# Altium PCB Jonathan ESC.PcbDoc
Units mm, origin at the board's own origin, x right, y up, seen from the top; angles counter-clockwise.
Board outline 31 x 50 mm, 4 copper layers (Top Layer, GND, 3V3, Bottom Layer), stack 1.64 mm thick; 60 components, 39 nets, 163 pads, 40 vias.
Unrouted connection lines stored in the file: 3.
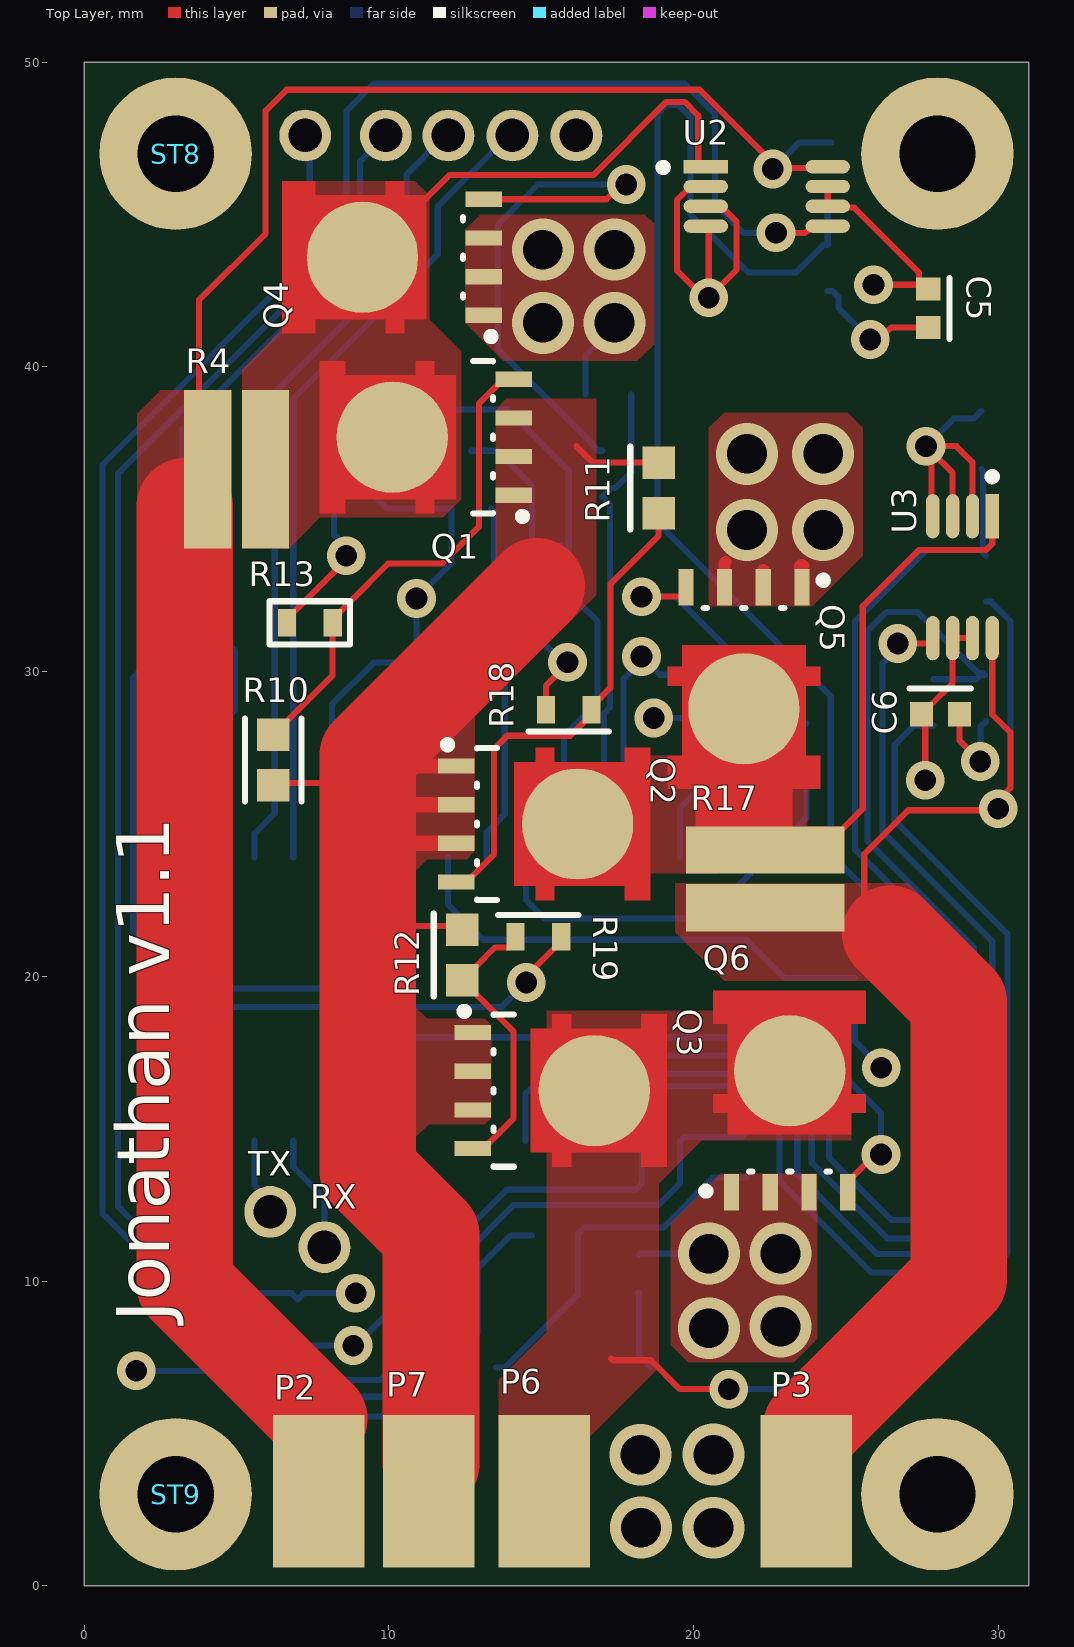
[diagram p0: Top Layer view]
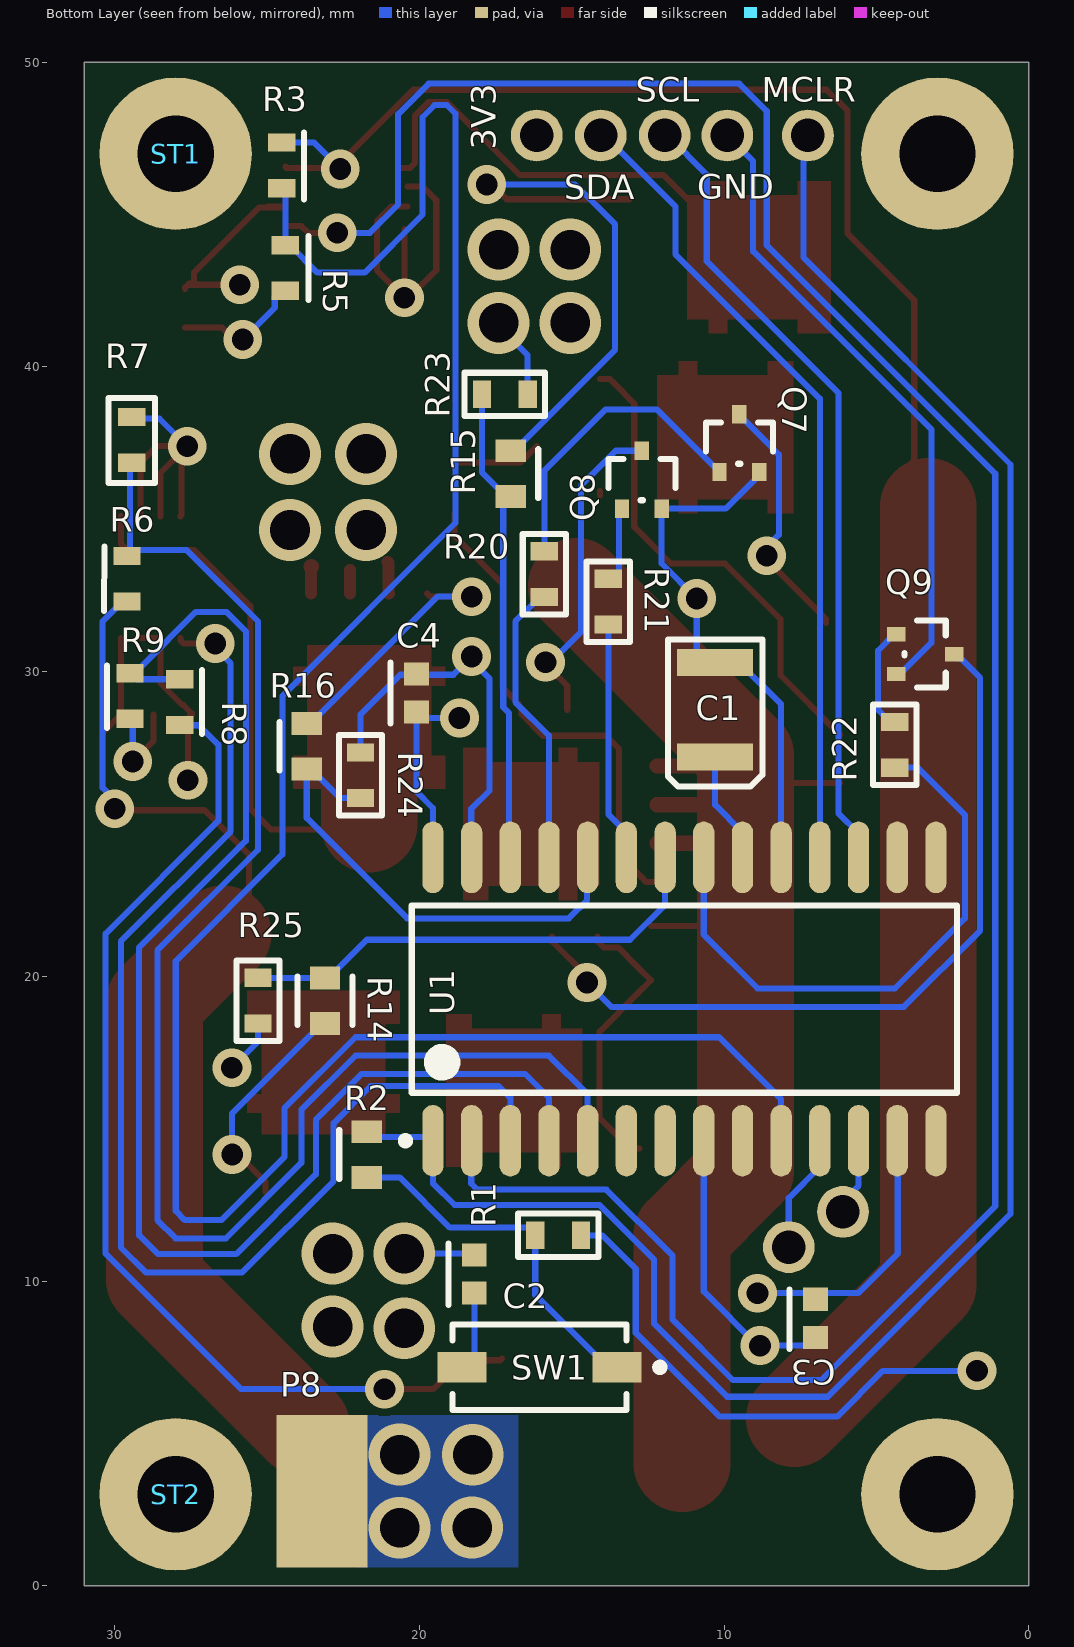
[diagram p1: Bottom Layer view, seen from below]
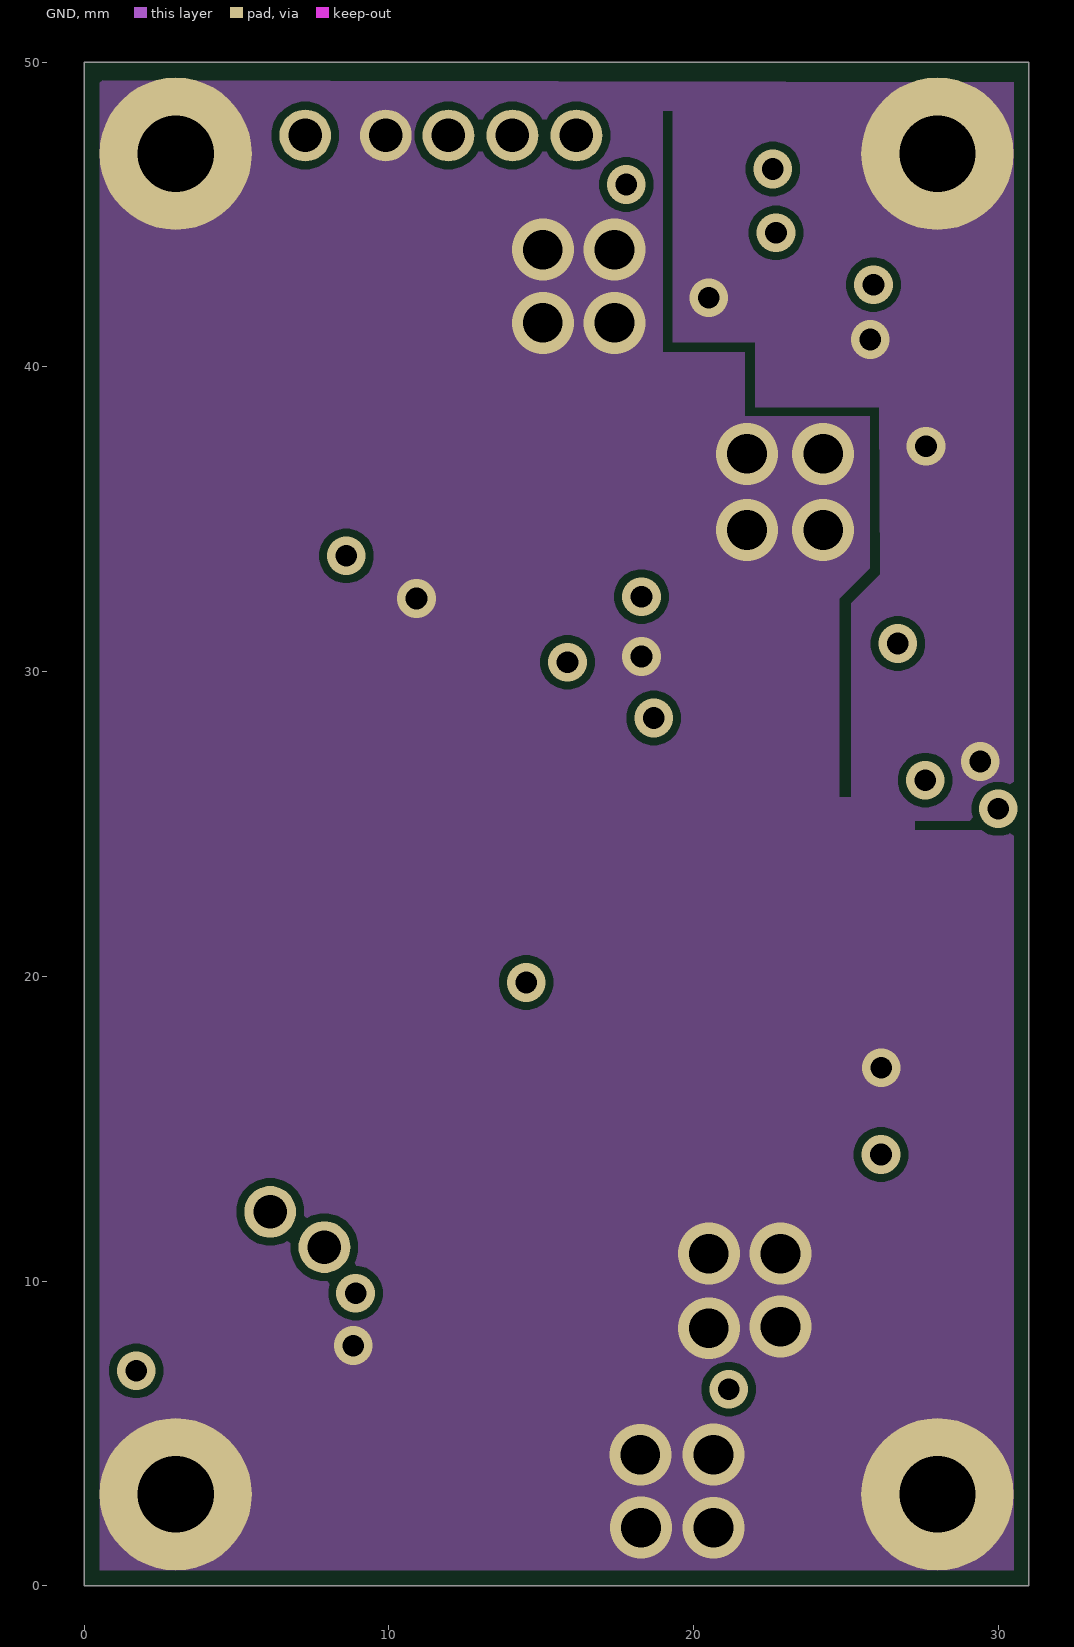
[diagram p2: GND]
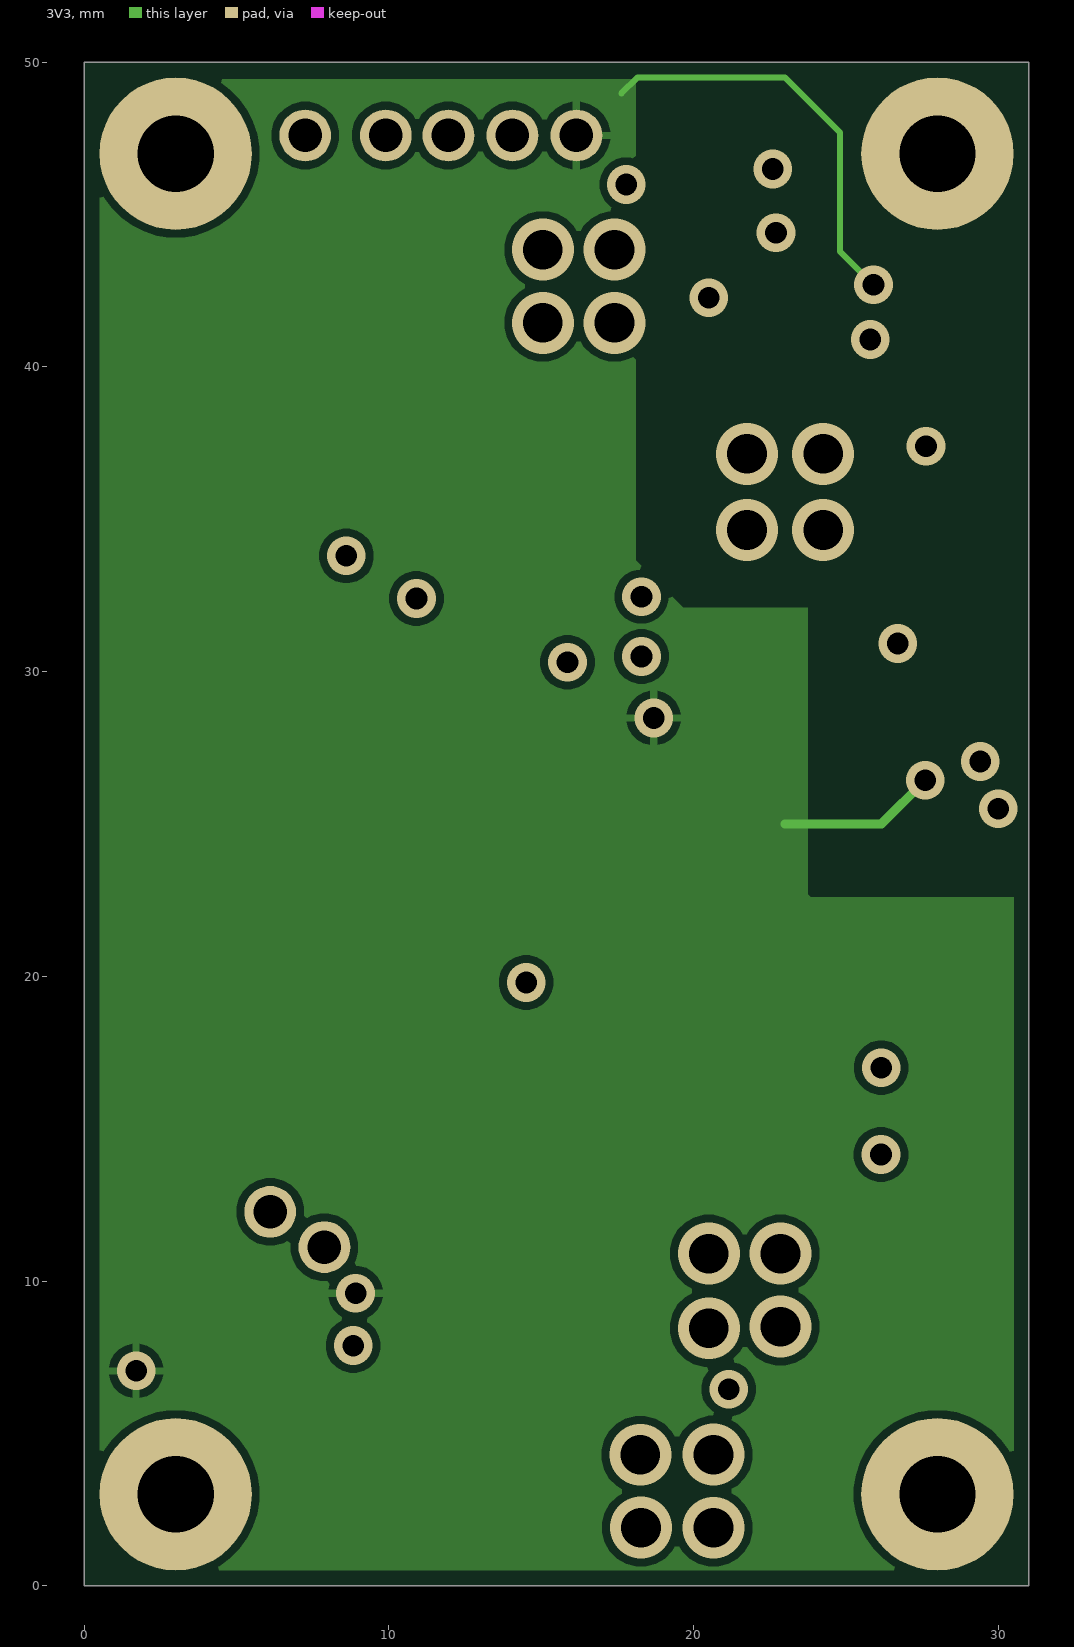
[diagram p3: 3V3]
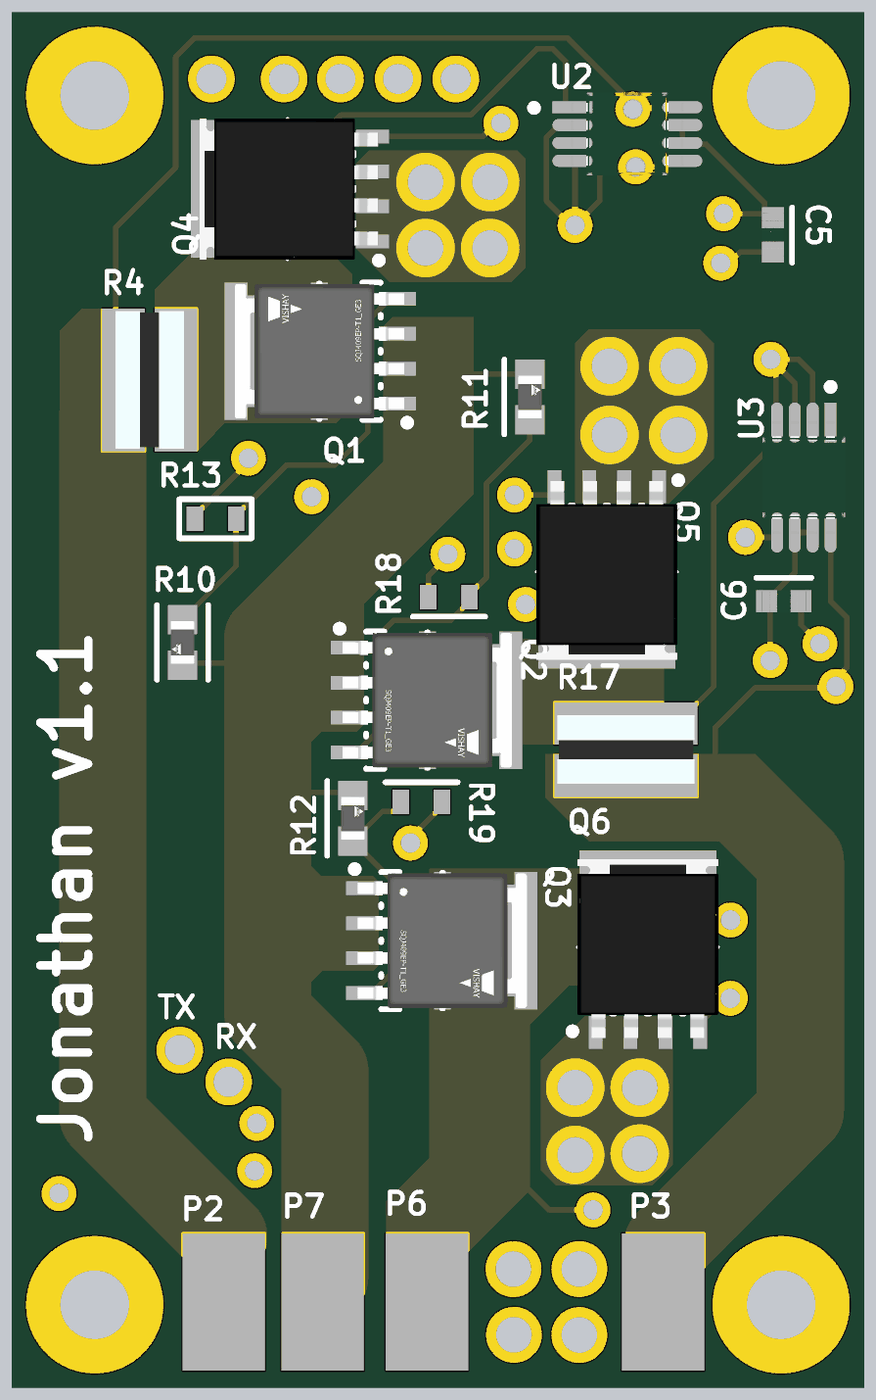
[diagram p4: 3D render of the assembled board from above, using the file's embedded part models]

## Layer stack, top to bottom
Top Solder: solder mask 0.0102, Solder Resist, Dk 3.5
Top Layer: signal copper 0.07
Dielectric 2: prepreg 0.2, FR-4, Dk 4.8
GND: signal copper 0.0175
Dielectric 3: core 1.065, FR-4, Dk 4.8
3V3: signal copper 0.0175
Dielectric 1: prepreg 0.2, FR-4, Dk 4.8
Bottom Layer: signal copper 0.07
Bottom Solder: solder mask 0.0102, Solder Resist, Dk 3.5

## Board outline
0,0 31,0 31,50 0,50

## Design rules (kind name [scope] priority, off if disabled: settings)
BoardOutlineClearance [All] p1: gap=0.254 ignorepadtopadclearanceinfootprint=FALSE
Clearance [All] p1: gap=0.254 ignorepadtopadclearanceinfootprint=FALSE except(0: Arc-Hole Track-Hole SMDPad-Hole THPad-Hole Via-Hole Fill-Hole Poly-Hole Region-Hole Text-Hole; 0.127: SMDPad-SMDPad; 0.15: SMDPad-Text THPad-Text; 0.2: Arc-Arc Arc-Track Arc-SMDPad Track-Track Track-SMDPad; 0.33: Arc-THPad Track-THPad)
HoleSize [All] p1: absolutevalues=TRUE maxlimit=6.3 minlimit=0.2 maxpercent=80.000 minpercent=20.000
HoleToHoleClearance [All] p1: gap=0.5 allowstackedmicrovias=TRUE
MinimumAnnularRing [All] p1: minimumring=0.2
MinimumSolderMaskSliver [All] p1: minsoldermaskwidth=0.2
PlaneConnect [All] p1: pad.planeconnectstyle=Relief pad.reliefexpansion=0.508 pad.reliefentries=4 pad.reliefconductorwidth=0.254 pad.reliefairgap=0.254 via.planeconnectstyle=Direct via.reliefexpansion=0.508 via.reliefentries=4 via.reliefconductorwidth=0.254 via.reliefairgap=0.254
PolygonConnect PolygonConnectHighCurrent [InNetClass('High Current')] p1: connectstyle=Direct reliefconductorwidth=0.254 reliefentries=4 polygonreliefangle="90 Angle" airgapwidth=0.254
PolygonConnect [All] p2: connectstyle=Relief reliefconductorwidth=0.254 reliefentries=4 polygonreliefangle="90 Angle" airgapwidth=0.254
RoutingVias [All] p1: holewidth=0.35 width=0.7 viastyle="Through Hole" minholewidth=0.2 minwidth=0.4 maxholewidth=6.3 maxwidth=3
SilkToSolderMaskClearance [(IsPad OR IsVia)] p1: minsilkscreentomaskgap=0.15 clearancetoexposedcopper=TRUE
SolderMaskExpansion [All] p1: expansion=0.05 istentingtop=FALSE
Width [All] p1: maxlimit=3.175 minlimit=0.2 preferedwidth=0.2
25 further rules are at their usual default settings.

## Classes and differential pairs
net class "High Current": +12 A_OUT B_OUT C_OUT GND NetQ1_5 NetQ2_5
component class "U_Three Phase Inverter": C5 C6 Q1 Q2 Q3 Q4 Q5 Q6 Q7 Q8 Q9 R3 R4 R5 R6 R7 R8 R9 R10 R11 R12 R13 R14 R15 R16 R17 R18 R19 R20 R21 R22 R23 R24 R25 U2 U3
component class U_MCU: C1 C2 C3 C4 R1 R2 SW1 U1
component class "Jonathan ESC": 3V3 GND MCLR P2 P3 P6 P7 P8 RX SCL SDA ST1 ST2 ST8 ST9 TX

## Components (designator, comment, footprint, x,y, rotation, side; value= is the part's Value field where it differs from the comment)
3V3 "Through Hole Pad" "THROUGH HOLE PAD"#1 16.15,47.6 r90 bottom
C1 "TPSB106K016R0500" TPSB106K016R0500 10.296,28.75 r270 bottom
C2 "CL10B104MB8NNNC" FP-CL10-IPC_C 18.2,10.227 r270 bottom
C3 "CL10B104MB8NNNC" FP-CL10-IPC_C 7,8.773 r270 bottom
C4 "CL10B104MB8NNNC" FP-CL10-IPC_C 20.1,29.3 r90 bottom
C5 "CL10B104MB8NNNC" FP-CL10-IPC_C 27.7,41.927 r270 top
C6 "CL10B104MB8NNNC" FP-CL10-IPC_C 28.1,28.6 r0 top
GND "Through Hole Pad" "THROUGH HOLE PAD"#1 9.896,47.6 r90 bottom
MCLR "Through Hole Pad" "THROUGH HOLE PAD"#2 7.2,47.6 r90 bottom
P2 "Power Pad" "POWER PAD" 7.7,3.1 r90 top
P3 "Power Pad" "POWER PAD" 23.7,3.1 r90 top
P6 "Power Pad" "POWER PAD" 15.1,3.1 r90 top
P7 "Power Pad" "POWER PAD" 11.3,3.1 r90 top
P8 "Power Pad" "POWER PAD" 23.2,3.1 r270 bottom
Q1 "SQJ409EP-T1_GE3" SQJ409EP-T1_GE3 11.181,37.695 r90 top
Q2 "SQJ409EP-T1_GE3" SQJ409EP-T1_GE3 15.119,25 r270 top
Q3 "SQJ409EP-T1_GE3" SQJ409EP-T1_GE3 15.669,16.25 r270 top
Q4 "SQJ860EP-T1_GE3" SQJ860EP 10.2,43.6 r90 top
Q5 "SQJ860EP-T1_GE3" SQJ860EP 21.65,29.85 r180 top
Q6 "SQJ860EP-T1_GE3" SQJ860EP 23.15,15.83 r0 top
Q7 "MMST4401-7-F" MMST4401-7-F 9.5,37.5 r180 bottom
Q8 "MMST4401-7-F" MMST4401-7-F 12.7,36.3 r180 bottom
Q9 "MMST4401-7-F" MMST4401-7-F 3.4,30.575 r270 bottom
R1 "RCS060310K0JNEA" RCS060310K0JNEA 15.45,11.5 r0 bottom
R2 "CRCW0603470RFKEA" FP-CRCW0603-e3-MFG 21.732,14.15 r90 bottom
R3 "270 Ohm 0603" ERJ-PA3J271V 24.52,46.62 r270 bottom
R4 "ERJB1CFR01U" ERJ-B1CFR01U 5,36.65 r180 top
R5 "100 Ohm 0603" CRCW0603100RJNEAHP 24.4,43.25 r270 bottom
R6 "270 Ohm 0603" ERJ-PA3J271V 29.6,33.05 r90 bottom
R7 "100 Ohm 0603" CRCW0603100RJNEAHP 29.441,37.609 r90 bottom
R8 "270 Ohm 0603" ERJ-PA3J271V 27.873,29 r90 bottom
R9 "100 Ohm 0603" CRCW0603100RJNEAHP 29.5,29.2 r270 bottom
R10 "MCT0603MD1003DP500" FP-MCT0603-IPC_A 6.2,27.1 r270 top
R11 "MCT0603MD1003DP500" FP-MCT0603-IPC_A 18.85,36.03 r90 top
R12 "MCT0603MD1003DP500" FP-MCT0603-IPC_A 12.4,20.7 r90 top
R13 "RCS060310K0JNEA" RCS060310K0JNEA 7.4,31.6 r0 top
R14 "CRCW0603220RFKEA" FP-CRCW0603-e3-MFG 23.1,19.2 r270 bottom
R15 "CRCW0603220RFKEA" FP-CRCW0603-e3-MFG 17,36.5 r90 bottom
R16 "CRCW0603220RFKEA" FP-CRCW0603-e3-MFG 23.7,27.55 r90 bottom
R17 "ERJB1CFR01U" ERJ-B1CFR01U 22.35,23.2 r270 top
R18 "RCS060310K0JNEA" RCS060310K0JNEA 15.9,28.75 r0 top
R19 "RCS060310K0JNEA" RCS060310K0JNEA 14.9,21.3 r180 top
R20 "RCS060310K0JNEA" RCS060310K0JNEA 15.9,33.2 r90 bottom
R21 "RCS060310K0JNEA" RCS060310K0JNEA 13.8,32.3 r90 bottom
R22 "RCS060310K0JNEA" RCS060310K0JNEA 4.4,27.6 r90 bottom
R23 "RCS060310K0JNEA" RCS060310K0JNEA 17.2,39.1 r0 bottom
R24 "RCS060310K0JNEA" RCS060310K0JNEA 21.935,26.6 r270 bottom
R25 "RCS060310K0JNEA" RCS060310K0JNEA 25.3,19.2 r90 bottom
RX "RX" "THROUGH HOLE PAD"#1 7.878,11.11 r0 top
SCL "Through Hole Pad" "THROUGH HOLE PAD"#1 11.95,47.6 r90 bottom
SDA "Through Hole Pad" "THROUGH HOLE PAD"#1 14.05,47.6 r90 bottom
ST1 "PTH-M2D5X5" PTH-M2D5X5 28,47 r180 bottom
ST2 "PTH-M2D5X5" PTH-M2D5X5 28,3 r180 bottom
ST8 "PTH-M2D5X5" PTH-M2D5X5 3,47 r0 top
ST9 "PTH-M2D5X5" PTH-M2D5X5 3,3 r0 top
SW1 "CHS-01TA" FP-CHS-01TA-MFG 16.06,7.167 r0 bottom
TX "TX" "THROUGH HOLE PAD"#3 6,12.27 r0 top
U1 "DSPIC33FJ09GS302-I/SO" MCHP-SOIC-SO28_M 11.303,19.254 r90 bottom locked
U2 "AD8418BRMZ" FP-RM-8-IPC_C 22.4,45.599 r0 top
U3 "AD8418BRMZ" FP-RM-8-IPC_C 28.825,33.1 r270 top

## Footprints (in the part's own frame and the unit in brackets; to place one, negate y for a bottom-side part, rotate by r counter-clockwise, add the part's x,y. Pads: shape width x height; smd on the part's side, far side on the other; paste and mask are expansions set on the pad)
CRCW0603100RJNEAHP [mm]
  rect 0.6x0.9 smd: 1(-0.75,0) 2(0.75,0)
  silkscreen extent -1.05,0.76 1.05,0.76
ERJ-B1CFR01U [mm]
  rect 1.55x5.2 smd: 1(-0.95,0) 2(0.95,0)
  body extent -1.25,-2.5 1.25,2.5, height 0.75
ERJ-PA3J271V [mm]
  rect 0.6x0.9 smd: 1(-0.75,0) 2(0.75,0)
  silkscreen extent -1.08,0.74 1.12,0.74
FP-CHS-01TA-MFG [mm]
  rect 1.6x1 smd paste+0 mask+0: 1(-2.54,0) 2(2.54,0)
  silkscreen extent -4.07,-1.4 2.85,1.4, body extent -2.8,-1.25 2.8,1.25, height 2.5
FP-CL10-IPC_C [mm]
  rect 0.758x0.812 smd paste+0 mask+0: 1(-0.627,0) 2(0.627,0)
  silkscreen extent -1.01,-0.85 1.01,-0.85, body extent -0.8,-0.4 0.8,0.4, height 0.9
FP-CRCW0603-e3-MFG [mm]
  rect 0.75x1 smd paste+0 mask+0: 1(-0.75,0) 2(0.75,0)
  silkscreen extent -0.8,0.9 0.8,0.9, body extent -0.77,-0.43 0.77,0.43, height 0.5
FP-MCT0603-IPC_A [mm]
  rect 1.064x1.062 smd paste+0 mask+0: 1(-0.829,0) 2(0.829,0)
  silkscreen extent -1.36,-0.93 1.36,0.93, body extent -1.86,-1.03 1.86,1.03, height 0.25
FP-RM-8-IPC_C [mm]
  rect 1.454x0.436 smd paste+0 mask+0: 1(-2,0.975)
  rrect100% 1.454x0.436 smd paste+0 mask+0: 2(-2,0.325) 3(-2,-0.325) 4(-2,-0.975) 5(2,-0.975) 6(2,-0.325) 7(2,0.325) 8(2,0.975)
  silkscreen extent -3.52,0.83 -3.27,1.07, body extent -2.83,-1.6 2.83,1.6, height 0.25
MCHP-SOIC-SO28_M [mm] "SOIC, 28-Leads, Body 17.9x7.5mm, Pitch 1.27mm, IPC Low Density"
  oval 2.35x0.7 smd: 1(-4.65,8.255) 2(-4.65,6.985) 3(-4.65,5.715) 4(-4.65,4.445) 5(-4.65,3.175) 6(-4.65,1.905) 7(-4.65,0.635) 8(-4.65,-0.635) 9(-4.65,-1.905) 10(-4.65,-3.175) 11(-4.65,-4.445) 12(-4.65,-5.715) 13(-4.65,-6.985) 14(-4.65,-8.255) 15(4.65,-8.255) 16(4.65,-6.985) 17(4.65,-5.715) 18(4.65,-4.445) 19(4.65,-3.175) 20(4.65,-1.905) 21(4.65,-0.635) 22(4.65,0.635) 23(4.65,1.905) 24(4.65,3.175) 25(4.65,4.445) 26(4.65,5.715) 27(4.65,6.985) 28(4.65,8.255)
  silkscreen extent -4.77,-8.95 3.08,9.28, body extent -3.75,-8.95 3.75,8.95, height 2.65
MMST4401-7-F [mm] "SOT-323"
  rect 0.47x0.6 smd paste+0 mask+0: 1(-0.65,-0.95) 2(0.65,-0.95) 3(0,0.95)
  silkscreen extent -1.1,-0.67 1.1,0.67, body extent -1,-1.05 1,1.05, height 1.2
"POWER PAD" [mm]
  rect 5x3 smd: 1(0,0)
PTH-M2D5X5 [mm]
  round 5 hole 2.5: 1(0,0)
RCS060310K0JNEA [mm]
  rect 0.6x0.9 smd: 1(-0.75,0) 2(0.75,0)
  silkscreen extent -1.32,-0.71 1.32,0.71
SQJ409EP-T1_GE3 [mm]
  rect 0.5x1.2 smd paste+0 mask+0: 1(-1.905,-2.915) 2(-0.635,-2.915) 3(0.635,-2.915) 4(1.905,-2.915)
  round 3.655 smd paste+0 mask+0: 5(0,1.07)
  Top Layer region: -2.5,3.45 2.5,3.45 2.5,2.615 2.03,2.615 2.03,0.305 2.5,0.305 2.5,-0.305 2.03,-0.305 2.03,-1.015 -2.03,-1.015 -2.03,-0.305 -2.5,-0.305 -2.5,0.305 -2.03,0.305 -2.03,2.615 -2.5,2.615
  silkscreen extent -2.72,-3.33 2.5,-1.57, body extent -2.73,-3.22 2.73,3.22, height 0.25
SQJ860EP [mm]
  rect 0.5x1.2 smd paste+0 mask+0: 1(-1.905,-2.915) 2(-0.635,-2.915) 3(0.635,-2.915) 4(1.905,-2.915)
  round 3.655 smd paste+0 mask+0: 5(0,1.07)
  Top Layer region: -2.5,3.7 2.5,3.7 2.5,2.615 2.03,2.615 2.03,0.305 2.5,0.305 2.5,-0.305 2.03,-0.305 2.03,-1.015 -2.03,-1.015 -2.03,-0.305 -2.5,-0.305 -2.5,0.305 -2.03,0.305 -2.03,2.615 -2.5,2.615
  silkscreen extent -2.72,-3.27 1.33,-2.23, body extent -2.62,-3.12 2.61,3.38, height 1.13
"THROUGH HOLE PAD"#1 [mm]
  round 1.7 hole 1.1: 1(0,0)
"THROUGH HOLE PAD"#2 [mm]
  round 1.7 hole 1.1: 1(0,0.05)
"THROUGH HOLE PAD"#3 [mm]
  round 1.7 hole 1.1: 1(0.1,0)
TPSB106K016R0500 [mm]
  rect 0.9x2.5 smd: 1(-1.55,0) 2(1.55,0)
  silkscreen extent -2.31,-1.55 2.51,1.55, body extent -1.75,-1.4 1.75,1.4, height 2.11

## Part data
C1: "CAP TANT 10UF 10% 16V SMD", Capacitance=10uF, Case Code (Imperial)=1210, Case Code (Metric)=3528, Dielectric Material=Tantalum, ESR (Equivalent Series Resistance)=500mR, Leakage Current=1.6uA, Manufacturer="Kyocera AVX", Max Operating Temperature=125°C, Min Operating Temperature=-55°C, Package Quantity=1, Supplier Part Number 1=478-5230-1-ND, Tolerance=10%, Voltage=16V, Case/Package=1210, Category="Tantalum Capacitors", ComponentLink1Description=https://datasheet.ciiva.com/11793/0900766b80e0c35e-11793349.pdf?src-supplier=RSComponents, ComponentLink1URL=https://datasheet.ciiva.com/11793/0900766b80e0c35e-11793349.pdf?src-supplier=RSComponents, ComponentLink2Description=https://datasheet.ciiva.com/264/tps-264229.pdf?src-supplier=Digi-Key, ComponentLink2URL=https://datasheet.ciiva.com/264/tps-264229.pdf?src-supplier=Digi-Key, ComponentLink3Description=https://datasheet.ciiva.com/7730/1441576-7730869.pdf?src-supplier=Element14, ComponentLink3URL=https://datasheet.ciiva.com/7730/1441576-7730869.pdf?src-supplier=Element14, ComponentLink4Description=https://datasheet.ciiva.com/17339/tps-17339429.pdf?src-supplier=Avnet+Europe, ComponentLink4URL=https://datasheet.ciiva.com/17339/tps-17339429.pdf?src-supplier=Avnet+Europe, ComponentLink5Description=https://datasheet.ciiva.com/264/tps-264230.pdf?src-supplier=Digi-Key, ComponentLink5URL=https://datasheet.ciiva.com/264/tps-264230.pdf?src-supplier=Digi-Key, ComponentLink6Description=https://datasheet.ciiva.com/7730/1680477-7730870.pdf?src-supplier=Element14, ComponentLink6URL=https://datasheet.ciiva.com/7730/1680477-7730870.pdf?src-supplier=Element14, ComponentLink7Description=https://datasheet.ciiva.com/16500/tps-16500230.pdf?src-supplier=Future+Electronics, ComponentLink7URL=https://datasheet.ciiva.com/16500/tps-16500230.pdf?src-supplier=Future+Electronics, ComponentLink8Description=https://datasheet.ciiva.com/264/tps-264231.pdf?src-supplier=Digi-Key, ComponentLink8URL=https://datasheet.ciiva.com/264/tps-264231.pdf?src-supplier=Digi-Key, ComponentLink9Description=https://datasheet.ciiva.com/7730/1441576-7730871.pdf?src-supplier=Element14, ComponentLink9URL=https://datasheet.ciiva.com/7730/1441576-7730871.pdf?src-supplier=Element14, ComponentLink10Description=https://datasheet.ciiva.com/12882/tps-23028-12882919.pdf?src-supplier=Mouser, ComponentLink10URL=https://datasheet.ciiva.com/12882/tps-23028-12882919.pdf?src-supplier=Mouser, ComponentLink11Description=https://datasheet.ciiva.com/28609/packmark-28609112.pdf?src-supplier=Element14, ComponentLink11URL=https://datasheet.ciiva.com/28609/packmark-28609112.pdf?src-supplier=Element14, ComponentLink12Description=https://datasheet.ciiva.com/14599/70001047-14599898.pdf?src-supplier=Allied+Electronics, ComponentLink12URL=https://datasheet.ciiva.com/14599/70001047-14599898.pdf?src-supplier=Allied+Electronics, ComponentLink13Description=https://datasheet.ciiva.com/14605/70001047-14605902.pdf?src-supplier=Allied+Electronics, ComponentLink13URL=https://datasheet.ciiva.com/14605/70001047-14605902.pdf?src-supplier=Allied+Electronics, Depth=2.8mm, Dissipation Factor=6%, Features="General Purpose", Height=1.9mm, Height - Seated (Max)=0.083inch, Lead Free="Lead Free", Length=3.5mm, Manufacturer Part Number=TPSB106K016R0500, Mount="Surface Mount,PCB", Packaging="Tape and Reel", Polarity=Polar, Pricing 1="1=0.45000, 10=0.31900, 50=0.24140, 100=0.21030, 500=0.15580, 1000=0.13243 (USD)", Radiation Hardening=No, REACH SVHC="No SVHC", RoHS=Yes, Stock 1=4, Supplier 1=Digi-Key, Termination=SMD/SMT, Voltage Rating=16V, Voltage Rating (DC)=16V, Width=0.11inch
C2 C3 C4 C5 C6: library part CMP-13271-001724-1, "Cap Ceramic 100nF 50V X7R ±20% Pad SMD 0603 +125°C T/R", Capacitance=100nF, Case Code (Imperial)=0603, Case Code (Metric)=1608, Dielectric=X7R, Max Operating Temperature=125°C, Min Operating Temperature=-55°C, Package Quantity=1, Tolerance=20%, Voltage Rating=50V, Case/Package=0603, Depth=0.8mm, Height=0.8mm, Lead Free="Lead Free", Length=1.6mm, Mount="Surface Mount", Packaging="Tape and Reel", Radiation Hardening=No, Thickness=0.035inch, Voltage Rating (DC)=50V, Width=0.031inch
Q4 Q5 Q6: "RESET GENERATOR SOT23", Manufacturer=Vishay, Supplier Part Number 1=SQJ860EP-T1_GE3CT-ND, Category=MOSFETs, Manufacturer Part Number=SQJ860EP-T1_GE3, Pricing 1="1=0.92000, 10=0.79400, 25=0.75720, 100=0.54940, 500=0.45910, 1000=0.39072 (USD)", RoHS=No, Stock 1=12489, Supplier 1=Digi-Key
Q7 Q8 Q9: "TRANS NPN 40V 0.6A SC70-3", Case/Package=SOT-323, Collector Base Voltage (VCBO)=60V, Collector Emitter Breakdown Voltage=40V, Collector-emitter Voltage-Max=750mV, Current Rating=600mA, Emitter Base Voltage (VEBO)=6V, Frequency=250MHz, Manufacturer=Diodes, Max Operating Temperature=150°C, Max Power Dissipation=200mW, Min Operating Temperature=-55°C, Package Quantity=3000, Supplier Part Number 1=MMST4401-FDICT-ND, Category=BJTs, Collector Emitter Voltage (VCEO)=40V, ComponentLink1Description=https://datasheet.ciiva.com/5782/ds30084-5782785.pdf?src-supplier=Avnet, ComponentLink1URL=https://datasheet.ciiva.com/5782/ds30084-5782785.pdf?src-supplier=Avnet, ComponentLink2Description=https://datasheet.ciiva.com/5782/ds30084-5782785.pdf?src-supplier=Farnell, ComponentLink2URL=https://datasheet.ciiva.com/5782/ds30084-5782785.pdf?src-supplier=Farnell, ComponentLink3Description=https://datasheet.ciiva.com/26943/getdatasheetpartid-157337-26943118.pdf?src-supplier=Verical, ComponentLink3URL=https://datasheet.ciiva.com/26943/getdatasheetpartid-157337-26943118.pdf?src-supplier=Verical, ComponentLink4Description=https://datasheet.ciiva.com/17302/ds30084-17302987.pdf?src-supplier=Avnet+Europe, ComponentLink4URL=https://datasheet.ciiva.com/17302/ds30084-17302987.pdf?src-supplier=Avnet+Europe, Element Configuration=Single, Gain Bandwidth Product=250MHz, Height=1mm, hFE Min=20, Lead Free="Lead Free", Length=2.2mm, Manufacturer Part Number=MMST4401-7-F, Max Breakdown Voltage=40V, Max Collector Current=600mA, Max Frequency=250MHz, Mount="Surface Mount", Number of Elements=1, Number of Pins=3, Packaging="Tape and Reel", Polarity=NPN, Power Dissipation=200mW, Pricing 1="1=0.25000, 10=0.20500, 25=0.17160, 100=0.10880, 500=0.07156, 1000=0.04865 (USD)", Radiation Hardening=No, REACH SVHC="No SVHC", RoHS=Yes, Series=-, Stock 1=2577, Supplier 1=Digi-Key, Transition Frequency=250MHz, Voltage Rating (DC)=40V, Weight=0.000212oz, Width=1.35mm
R1 R13 R18 R19 R20 R21 R22 R23 R24 R25: "RES SMD 10K OHM 5% 1/4W 0603", Case Code (Imperial)=0603, Case Code (Metric)=1608, Manufacturer="Vishay Dale", Max Operating Temperature=155°C, Max Power Dissipation=250mW, Min Operating Temperature=-55°C, Resistance=10kR, Resistor Type="Thick Film", Supplier Part Number 1=541-2817-1-ND, Temperature Coefficient=200ppm/°C, Tolerance=5%, Case/Package=0603, Category="Chip SMD Resistors", ComponentLink1Description=http://www.vishay.com/docs/20065/rcse3.pdf?src-supplier=Digi-Key, ComponentLink1URL=http://www.vishay.com/docs/20065/rcse3.pdf?src-supplier=Digi-Key, Features="Automotive AEC-Q200", Height=0.02inch, Length=0.061inch, Manufacturer Part Number=RCS060310K0JNEA, Number of Terminations=2, Packaging="Tape and Reel", Pricing 1="1=0.14000, 10=0.12900, 100=0.04950, 1000=0.02178, 2500=0.01881 (USD)", RoHS=Yes, Stock 1=1896, Supplier 1=Digi-Key, Width=0.033inch
R2: library part CMP-2000-03373-2, "RES Thick Film, 470Ω, 1%, 0.1W, 100ppm/°C, 0603", Case Code (Imperial)=0603, Case Code (Metric)=1608, Max Operating Temperature=155°C, Max Power Dissipation=100mW, Min Operating Temperature=-55°C, Package Quantity=10, Resistance=470R, Temperature Coefficient=100ppm/°C, Tolerance=1%, Voltage Rating=75V, Case/Package=0603, Composition="Thick Film", Contact Plating=Tin, Depth=0.85mm, Features="Automotive AEC-Q200", Height=0.45mm, Lead Free="Lead Free", Length=1.55mm, Military Standard=Not, Mount="Surface Mount", Number of Terminations=2, Packaging="Tape and Reel", Power Rating=100mW, Radiation Hardening=No, Termination=SMD/SMT, Voltage Rating (DC)=75V, Weight=7.1E-05oz, Width=0.033inch
R3 R6 R8: library part ERJ-PA3J271V, "Res Thick Film 0603 270 Ohm 5% 0.25W(1/4W) ±200ppm/C Pad SMD Automotive T/R", Case Code (Imperial)=0603, Case Code (Metric)=1608, Manufacturer=Panasonic, Max Operating Temperature=155°C, Max Power Dissipation=250mW, Min Operating Temperature=-55°C, Resistance=270R, Resistor Type="Thick Film", Supplier Part Number 1=P270BZCT-ND, Temperature Coefficient=200ppm/°C, Tolerance=5%, Case/Package=0603, Category="Chip SMD Resistors", ComponentLink1Description=https://industrial.panasonic.com/cdbs/www-data/pdf/RDO0000/AOA0000C331.pdf?src-supplier=Digi-Key, ComponentLink1URL=https://industrial.panasonic.com/cdbs/www-data/pdf/RDO0000/AOA0000C331.pdf?src-supplier=Digi-Key, ComponentLink2Description=https://industrial.panasonic.com/ww/system/files/data/download/catalog/id_fixed-resistors_e_1.pdf?src-supplier=Digi-Key, ComponentLink2URL=https://industrial.panasonic.com/ww/system/files/data/download/catalog/id_fixed-resistors_e_1.pdf?src-supplier=Digi-Key, Features="Automotive AEC-Q200", Height=0.018inch, Length=0.063inch, Manufacturer Part Number=ERJ-PA3J271V, Number of Terminations=2, Packaging="Tape and Reel", Pricing 1="1=0.10000, 10=0.08600, 100=0.03300, 1000=0.01452, 2500=0.01254 (USD)", RoHS=Yes, Stock 1=14468, Supplier 1=Digi-Key, Width=0.031inch
R4 R17: "Res Thick Film 1020 0.01 Ohm 1% 2W ±350ppm/°C Molded SMD Embossed Carrier T/R", Case Code (Imperial)=1020, Case Code (Metric)=2550, Case/Package=2010, Manufacturer=Panasonic, Max Operating Temperature=155°C, Max Power Dissipation=2W, Min Operating Temperature=-55°C, Package Quantity=5000, Resistance=10mR, Resistance Tolerance=1%, Resistor Type="Thick Film", Supplier Part Number 1=ERJ-B1CFR01U-ND, Temperature Coefficient=350ppm/°C, Voltage Rating=200V, Category="Chip SMD Resistors", ComponentLink1Description=https://datasheet.ciiva.com/43466/1688501-43466679.pdf?src-supplier=Farnell, ComponentLink1URL=https://datasheet.ciiva.com/43466/1688501-43466679.pdf?src-supplier=Farnell, ComponentLink2Description=https://datasheet.ciiva.com/46383/1688501-46383655.pdf?src-supplier=Element14, ComponentLink2URL=https://datasheet.ciiva.com/46383/1688501-46383655.pdf?src-supplier=Element14, ComponentLink3Description=https://datasheet.ciiva.com/46375/1688501-46375722.pdf?src-supplier=Element14, ComponentLink3URL=https://datasheet.ciiva.com/46375/1688501-46375722.pdf?src-supplier=Element14, ComponentLink4Description=https://datasheet.ciiva.com/9194/aoa0000ce23-9194124.pdf?src-supplier=Avnet, ComponentLink4URL=https://datasheet.ciiva.com/9194/aoa0000ce23-9194124.pdf?src-supplier=Avnet, Construction=Rectangular, Contact Plating=Tin, Depth=5mm, Height=0.03inch, Length=2.5mm, Manufacturer Part Number=ERJB1CFR01U, Military Standard=Not, Mount="Surface Mount", Number of Terminations=2, Packaging="Tape and Reel", Power Rating=2W, Pricing 1="5000=0.51892 (USD)", Radiation Hardening=No, REACH SVHC="No SVHC", RoHS=Yes, RoHS Compliant=Yes, Series=ERJ, Supplier 1=Digi-Key, Tolerance=1%, Voltage Rating (DC)=200V, Width=0.197inch
R5 R7 R9: library part CRCW0603100RJNEAHP, "Res Thick Film 0603 100 Ohm 5% 1/4W 200ppm/C Molded SMD SMD Paper T/R", Case Code (Imperial)=0603, Case Code (Metric)=1608, Manufacturer="Vishay Dale", Max Operating Temperature=155°C, Max Power Dissipation=250mW, Min Operating Temperature=-55°C, Package Quantity=5000, Resistance=100R, Resistor Type="Thick Film", Supplier Part Number 1=541-100SACT-ND, Temperature Coefficient=200ppm/°C, Tolerance=5%, Voltage Rating=75V, Case/Package=0603, Category="Chip SMD Resistors", ComponentLink1Description=https://datasheet.ciiva.com/5562/crcwhpe3-46056-5562229.pdf?src-supplier=Mouser, ComponentLink1URL=https://datasheet.ciiva.com/5562/crcwhpe3-46056-5562229.pdf?src-supplier=Mouser, ComponentLink2Description=https://datasheet.ciiva.com/8979/crcwhpe3-8979829.pdf?src-supplier=Avnet, ComponentLink2URL=https://datasheet.ciiva.com/8979/crcwhpe3-8979829.pdf?src-supplier=Avnet, ComponentLink3Description=https://datasheet.ciiva.com/16886/crcwhpe3-16886006.pdf?src-supplier=Avnet+Europe, ComponentLink3URL=https://datasheet.ciiva.com/16886/crcwhpe3-16886006.pdf?src-supplier=Avnet+Europe, Construction=Rectangular, Contact Plating=Tin, Depth=0.85mm, Features="Automotive AEC-Q200", Height=0.45mm, Lead Free="Lead Free", Length=1.6mm, Manufacturer Part Number=CRCW0603100RJNEAHP, Military Standard=Not, Mount="Surface Mount", Number of Terminations=2, Packaging="Tape and Reel", Power Rating=250mW, Pricing 1="1=0.15000, 10=0.12900, 100=0.05060, 1000=0.02119, 2500=0.01942 (USD)", Radiation Hardening=No, RoHS=Yes, RoHS Compliant=Yes, Series=CRCW-HP, Stock 1=23670, Supplier 1=Digi-Key, Termination=SMD/SMT, Weight=7.1E-05oz, Width=0.8mm
R10: library part CMP-02407-000782-1, "RES SMD 100K OHM 1% 1/8W 0603", Case Code (Imperial)=0603, Case Code (Metric)=1608, Max Operating Temperature=175°C, Max Power Dissipation=150mW, Min Operating Temperature=-55°C, Package Quantity=1, Power Rating=125mW, Resistance=100kR, Temperature Coefficient=25ppm/°C, Tolerance=0.5%, Voltage Rating=75V, Case/Package=0603, Composition="Thin Film", Depth=0.85mm, Features="Automotive AEC-Q200", Height=0.022inch, Length=0.061inch, Military Standard=Not, Number of Terminations=2, Packaging="Tape and Reel", REACH SVHC="No SVHC", Voltage Rating (DC)=75V, Width=0.033inch
R11 R12: library part CMP-02407-000782-1, "RES SMD 100 OHM 1% 1/8W 0603", Case Code (Imperial)=0603, Case Code (Metric)=1608, Max Operating Temperature=175°C, Max Power Dissipation=150mW, Min Operating Temperature=-55°C, Package Quantity=1, Power Rating=125mW, Resistance=100kR, Temperature Coefficient=25ppm/°C, Tolerance=0.5%, Voltage Rating=75V, Case/Package=0603, Composition="Thin Film", Depth=0.85mm, Features="Automotive AEC-Q200", Height=0.022inch, Length=0.061inch, Military Standard=Not, Number of Terminations=2, Packaging="Tape and Reel", REACH SVHC="No SVHC", Voltage Rating (DC)=75V, Width=0.033inch
R14 R15 R16: library part CMP-2000-03085-2, "RES Thick Film, 220Ω, 1%, 0.1W, 100ppm/°C, 0603", Case Code (Imperial)=0603, Case Code (Metric)=1608, Max Operating Temperature=155°C, Max Power Dissipation=100mW, Min Operating Temperature=-55°C, Package Quantity=10, Resistance=220R, Temperature Coefficient=100ppm/°C, Tolerance=1%, Voltage Rating=75V, Case/Package=0603, Composition="Thick Film", Contact Plating=Tin, Depth=0.85mm, Features="Automotive AEC-Q200", Height=0.45mm, Lead Free="Lead Free", Length=1.55mm, Military Standard=Not, Number of Terminations=2, Packaging="Tape and Reel", Power Rating=100mW, Radiation Hardening=No, Termination=SMD/SMT, Voltage Rating (DC)=75V, Weight=7.1E-05oz, Width=0.033inch
RX TX: library part "Through Hole Pad"
ST1 ST2 ST8 ST9: library part CMP-00028-00004-1, "M2 PTH (2.5mm), 5mm pad", Pins=1
SW1: library part CMP-71740-000003-1, "SWITCH SLIDE DIP SPST 100MA 6V", Contact Current Rating=100mA, Contact Resistance=50mΩ, Manufacturer="Nidec Copal Electronics", Temperature="-40°C to +85°C", Temperature Range High=+85°C, Temperature Range Low=-40°C, Voltage Rating Dc=6V, Automotive=No, Category=Switch, ComponentLink2Description=Datasheet, ComponentLink2URL=https://www.nidec-copal-electronics.com/e/catalog/switch/chs.pdf, Device Class L1=Electromechanical, Device Class L2=Switches, Device Class L3="DIP Switches", Digikey Description="SWITCH SLIDE DIP SPST 100MA 6V", Electromechanical Life=2000Cycles, Height=2.5mm, Lead Free=Yes, Manufacturer Part Number=CHS-01TA, Mount="Surface Mount", Number Of Circuits=1, Octopart=https://octopart.com/chs-01ta-nidec+copal-52304644, Package=CHS-01TA, RoHS=TRUE, Standoff Height=0mm, Throw Configuration=SPST
U1: library part CMP-0045-00654-1, "16-Bit Microcontroller and Digital Signal Controller with High-Speed PWM, ADC and Comparator, 40 MIPS, 21 I/O, GPIO, -40 to 85 degC, 28-pin SOIC (SO28), Tube", Manufacturer=Microchip, ComponentLink1Description="Manufacturer URL", ComponentLink1URL=http://www.microchip.com, ComponentLink2Description=Datasheet, ComponentLink2URL=http://ww1.microchip.com/downloads/en/DeviceDoc/75018c.pdf, ComponentLink3Description="Package Specification", ComponentLink3URL=http://www.microchip.com/stellent/groups/techpub_sg/documents/packagingspec/en012702.pdf, ComponentLink4Description="Product URL", ComponentLink4URL=http://www.microchip.com/dsPIC33FJ09GS302, DatasheetVersion="Rev. C", Mounting Technology="Surface Mount", PackageDescription="28-Lead Plastic Small Outline, 17.9 x 7.5 mm Body, 1.27 mm Pitch", PackageReference=SOIC-SO28, PackageVersion=C04-052C, PartNumber=DSPIC33FJ09GS302-I/SO
U2 U3: library part CMP-09116-000026-1, "IC CURR SENSE 1 CIRCUIT 8MSOP", Input Bias Current=130uA, Input Offset Voltage=0.2mV, Manufacturer="Analog Devices", Max Supply Voltage=5.5V, Min Supply Voltage=2.7V, Nominal Supply Current=2.6mA, Package=RM-8, Temperature="-40°C to +125°C", Temperature Range High=+125°C, Temperature Range Low=-40°C, Voltage Gain=0.02V/mV, Automotive=No, Bandwidth=250kHz, Category=IC, ComponentLink2Description=Datasheet, ComponentLink2URL=https://www.analog.com/media/en/technical-documentation/data-sheets/AD8418.pdf, Device Class L1="Integrated Circuits (ICs)", Device Class L2="Linear ICs", Device Class L3=Instrumentation, Digikey Description="IC CURR SENSE 1 CIRCUIT 8MSOP", Height=1.1mm, Ipc Land Pattern Name=SOP65P490X110-8, Lead Free=Yes, Manufacturer Part Number=AD8418BRMZ, Mouser Description="Current Sense Amplifier, Bidirectional, 1, 130 A, MSOP, 8, -40 C, 125 C", Number Of Channels=1, Octopart=https://octopart.com/ad8418brmz-analog+devices-21054230, RoHS=TRUE, Standoff Height=0.05mm

## Via types
v1: diameter 1.27, hole 0.711, Top Layer to Bottom Layer, 24 vias
v2: diameter 2.032, hole 1.3, Top Layer to Bottom Layer, 16 vias

## Nets (pads, with @x,y where several pads share a name; then routed paths per layer and width w, separated by ;. In a path a pad name is that pad's centre, name@x,y a point inside that pad or via, vN(x,y) a via of type N, cw(c..) or ccw(c..) an arc to the next point about the centre after c; other vN are vias at no path point)
3V3: 3V3.1 C3.1 C4.1 C5.1 C6.1 R1.1 U1.13 U1.28 U2.6 U2.7 U3.6 U3.7 | length 64.9
  Top Layer w0.2: U2.7 U2.6 ; U2.6@24.973,45.274 U2.6 ; v1(25.9,42.7) C5.1@27.527,42.7 ; v1(27.6,26.439) 27.6,28.473 C6.1 27.473,28.627 27.752,28.906 27.779,28.906 28.5,29.627 U3.6 U3.7 ; C5.1 27.7,42.6 27.563,42.737 27.49,42.737 27.394,42.833 27.394,43.106 25.271,45.229 24.445,45.229 U2.6
  3V3 w0.2: 17.628,48.978 18.15,49.5 23,49.5 24.8,47.7 24.8,43.8 v1(25.9,42.7)
  3V3 w0.3: 23,25 26.161,25 v1(27.6,26.439)
  Bottom Layer w0.2: v1(1.7,7.05) 4.787,7.05 6.287,5.55 10.15,5.55 12.9,8.3 12.9,10.4 14,11.5 R1.1 ; U1.13 4.3,14.586 4.3,10.9 5.6,9.6 6.8,9.6 C3.1 7.2,9.6 v1(8.904,9.6) ; v1(18.689,28.481) 19.908,28.481 C4.1 ; U1.28 19.558,25.526 20.1,26.068 C4.1@20.1,28.682
+12: P7.1 Q1.1 Q1.2 Q1.3 Q2.1 Q2.2 Q2.3 Q3.1 Q3.2 Q3.3 R10.2 R11.2 R12.2 | length 51
  Top Layer w0.2: R10.2@6.2,26.35 8.4,26.35 9.3,27.25 ; 9.3,21.7 9.35,21.65 R12.2@12.4,21.65 ; Q1.1@14.076,35.79 Q1.1@14.076,35.926 ; 16.15,37.4 16.69,36.86 R11.2
  Top Layer w0.5: 9.3,27.25 9.645,26.905 Q2.1 ; Q2.3 10.489,24.365 9.3,25.554 9.381,25.635 Q2.2
  Top Layer w3.175: P7.1@11.38,4.013 11.38,11.522 9.3,13.602 9.3,21.7 9.3,25.554 9.3,27.25 14.85,32.8
A_OUT: P2.1 R3.1 R4.2 U2.8 | length 66.8
  Top Layer w0.2: R4.2 3.76,36.94 3.76,42.19 5.95,44.38 5.95,48.41 6.64,49.1 20.2,49.1 22.6,46.7 v1(22.6,46.5) 22.637,46.537 24.363,46.537 U2.8
  Top Layer w3.175: R4.2@3.3,35.42 3.3,9.879 P2.1@7.7,5.479
  Bottom Layer w0.2: v1(22.6,46.5) 23.47,47.37 R3.1
B_OUT: P3.1 R6.1 R17.2 U3.8 | length 40.4
  Top Layer w0.2: 26.45,21.4 25.6,22.25 25.6,24 27.05,25.45 v1@29.95,25.45 ; U3.8 29.8,28.594 30.4,27.994 30.4,26.19 30,25.79 v1(30,25.5)
  Top Layer w3.175: P3.1@23.868,5.218 28.7,10.05 28.7,19.15 26.45,21.4
  Bottom Layer w0.2: R6.1 29.75,32.3 30.4,31.65 30.4,26.19 30,25.79 v1(30,25.5)
C_OUT: P6.1 Q3.5 Q6.5 R8.1 | length 35
  Top Layer w0.2: 17.295,7.455 17.35,7.4 18.6,7.4 19.55,6.45 v1(21.15,6.45)
  Bottom Layer w0.2: v1(21.15,6.45) 25.85,6.45 30.3,10.9 30.3,21.4 26.6,25.1 26.6,27.6 27.24,28.24 R8.1@27.863,28.24
GND: C1.1 C2.1 C3.2 C4.2 C5.2 C6.2 GND.1 P8.1 Q4.1 Q4.2 Q4.3 Q5.1 Q5.2 Q5.3 Q6.1 Q6.2 Q6.3 Q7.2 Q8.2 Q9.2 R5.2 R7.2 R9.2 R23.1 R24.1 R25.1 ST1.1 ST2.1 ST8.1 ST9.1 U1.8 U1.19 U1.27 U2.2 U2.3 U2.4 U3.2 U3.3 U3.4 | length 100.7
  Top Layer w0.2: U2.3 20.908,45.274 21.4,44.782 21.4,43.178 v1(20.494,42.272) ; U2.2 19.897,45.924 19.45,45.477 19.45,43.175 20.353,42.272 v1(20.494,42.272) ; U2.4@20.494,44.529 v1(20.494,42.272) ; v1(25.8,40.9) 26.09,40.9 26.49,41.3 C5.2 ; U3.4 27.805,35.146 v1@27.805,37.221 ; U3.3 28.5,36.525 v1@27.805,37.221 ; C6.2 28.727,27.734 v1(29.411,27.05) v1@29.15,27.05 ; U3.2 29.15,36.875 28.625,37.4 v1(27.625,37.4) v1@27.805,37.221
  Top Layer w0.3: Q5.2@22.285,33.335 Q5.2@22.3,33.35
  Top Layer w0.4: Q5.3@21.01,32.57 21.015,32.565 Q5.3 21.015,33.565 21.05,33.6 ; Q5.2@22.285,32.565 Q5.2 Q5.2@22.285,33.335 ; Q5.1@23.555,32.565 Q5.1 23.555,33.445
  Top Layer w0.5: 23.55,33.45 23.555,33.445
  Bottom Layer w0.2: Q9.2@4.15,30 3.2,30.95 3.2,37.95 9.05,43.8 9.05,46.754 GND.1 ; C3.2 7.266,7.88 v1(8.824,7.88) 8.89,7.88 10.668,9.658 U1.8 ; U1.19@8.128,23.079 U1.19 8.128,28.932 9.496,30.3 C1.1 10.55,30.3 10.9,30.65 v1(10.9,32.4) 12.05,33.55 Q8.2 9.95,35.35 8.85,36.45 Q7.2 ; R23.1 16.45,40.389 17.4,41.339 v2(17.4,41.45) ; C2.1 18.246,10.9 v2(20.5,10.9) ; v1@18.25,30.5 18.289,30.461 18.289,30.356 17.7,29.767 17.7,26.1 18.3,25.5 18.3,23.916 U1.27 ; v1(18.289,30.5) 18.889,29.9 20.1,29.9 20.63,29.9 21.935,28.596 R24.1 ; R5.2 24.55,42.5 24.75,42.3 24.75,41.95 v1(25.8,40.9) ; R25.1 25.3,17.856 v1(26.156,17) v1@26.156,17.144 ; v1(27.625,37.4) 28.533,38.309 29.191,38.309 R7.2@29.441,38.559 ; v1(29.411,27.05) 29.411,28.191 R9.2@29.6,28.38
  other v2: 18.27,1.907 20.65,1.9 18.25,4.297 20.65,4.3 20.5,8.45 22.85,8.5 22.85,10.9 21.75,34.65 24.25,34.65 21.75,37.15 24.25,37.15 15.05,41.45 15.05,43.85 17.4,43.85
NetC1_2: C1.2 U1.20 | length 3.7
  Bottom Layer w0.2: U1.20 9.398,24.729 10.296,25.628 C1.2
NetC2_2: C2.2 SW1.2 | length 2.6
  Bottom Layer w0.2: C2.2@18.173,9.6 C2.2 18.2,7.567 SW1.2
NetMCLR_1: MCLR.1 R2.2 U1.1 | length 67.1
  Bottom Layer w0.2: MCLR.1@7.4,47.2 7.4,43.6 0.6,36.8 0.6,12.2 6.6,6.2 9.9,6.2 12.3,8.6 12.3,10.7 14.1,12.5 18.85,12.5 19.558,13.208 U1.1 19.679,14.725 21.557,14.725 R2.2
NetQ1_4: Q1.4 R10.1 R13.2 | length 16.2
  Top Layer w0.2: R10.1 8.15,29.88 R13.2 8.15,31.725 8.725,32.3 9.975,33.55 11.75,33.55 12.95,34.75 12.95,38.8 13.596,39.446 13.596,39.45 13.746,39.6 Q1.4@14.076,39.6
NetQ1_5: Q1.5 Q4.5 R4.1 U2.1 | length 13.1
  Top Layer w0.2: 10.847,45.163 11.984,46.3 16.7,46.3 19.1,48.7 19.7,48.7 20.151,48.249 20.151,46.692 20.318,46.525 U2.1@20.7,46.525
NetQ2_4: Q2.4 R11.1 R18.2 | length 16
  Top Layer w0.2: Q2.4 12.554,23.095 12.704,23.245 12.704,23.254 13.45,24 13.45,27.468 13.88,27.898 15.948,27.898 16.65,28.6 R18.2 ; R18.2@16.75,28.95 17.267,29.467 17.267,32.873 18.85,34.456 R11.1
NetQ2_5: Q2.5 Q5.5 R17.1 U3.1 | length 20.4
  Top Layer w0.2: R17.1@22.35,24 23.175,24.825 24.875,24.825 25.55,25.5 25.55,32.15 27.4,34 29.6,34 29.8,34.2 U3.1
  Top Layer w3.175: 21.65,25 Q5.5@21.65,28.88
NetQ3_4: Q3.4 R12.1 R19.2 | length 9.4
  Top Layer w0.2: Q3.4@12.774,14.345 13.104,14.345 13.254,14.495 13.254,14.504 14.09,15.34 14.09,18.181 12.832,19.439 R12.1 R12.1 12.831,20.302 13.479,20.95 13.95,20.95 14.15,21.15 R19.2
NetQ4_4: Q4.4 R15.2 | length 18.6
  Top Layer w0.2: Q4.4 17.14,45.505 17.625,45.99 v1(17.792,45.99)
  Bottom Layer w0.2: R15.2 16.875,37.25 16.6,37.525 16.6,37.55 13.58,40.57 13.58,44.68 14.89,45.99 v1(17.792,45.99)
NetQ5_4: Q5.4 R16.2 | length 8.6
  Top Layer w0.2: v1(18.289,32.463) 19.643,32.463 Q5.4@19.745,32.565
  Bottom Layer w0.2: v1(18.289,32.463) 19.412,32.463 23.575,28.3 R16.2
NetQ6_4: Q6.4 R14.2 | length 7.4
  Top Layer w0.2: Q6.4 25.055,13.265 25.94,14.15 v1(26.15,14.15)
  Bottom Layer w0.2: R14.2@23.225,18.55 23.5,18.275 23.5,18.15 26.15,15.5 v1(26.15,14.15)
NetQ7_1: Q7.1 R20.2 | length 10.5
  Bottom Layer w0.2: Q7.1@10.15,36.65 Q7.1 12.2,38.6 13.9,38.6 15.9,36.6 R20.2 ; R20.2@15.65,34.15 15.65,33.9 R20.2@15.7,33.85
NetQ7_3: Q7.3 R13.1 | length 8.4
  Top Layer w0.2: R13.1 6.65,31.725 8.6,33.675 v1(8.6,33.8)
  Bottom Layer w0.2: v1(8.6,33.8) 8.6,34.09 8.2,34.49 8.2,37.124 8.688,37.612 9.326,38.25 9.365,38.25 9.5,38.385 Q7.3
NetQ8_1: Q8.1 R21.2 | length 2.6
  Bottom Layer w0.2: Q8.1 13.45,35.25 13.45,33.25 13.65,33.05 R21.2
NetQ8_3: Q8.3 R18.1 | length 10.7
  Top Layer w0.2: R18.1 15.15,29.533 15.861,30.244 v1(15.861,30.309)
  Bottom Layer w0.2: Q8.3 13.55,37.25 14.7,36.1 14.7,31.3 15.691,30.309 v1(15.861,30.309)
NetQ9_1: Q9.1 R22.2 | length 3.5
  Bottom Layer w0.2: Q9.1 4.415,31.225 4.95,30.69 4.95,28.75 4.55,28.35 R22.2
NetQ9_3: Q9.3 R19.1 | length 25.7
  Top Layer w0.2: v1(14.5,19.8) 14.5,20 15.65,21.15 R19.1
  Bottom Layer w0.2: Q9.3 2.315,30.44 2.24,30.44 1.598,29.798 1.598,21.502 4.1,19 13.7,19 v1(14.5,19.8)
NetR1_2: R1.2 R2.1 SW1.1 | length 12
  Bottom Layer w0.2: SW1.1 13.82,7.167 16.2,9.547 16.2,11.55 16.4,11.75 19,11.75 20.65,13.4 R2.1
NetR3_2: R3.2 R5.1 U1.10 | length 77.6
  Bottom Layer w0.2: U1.10 8.128,15.964 10.164,18 22.1,18 24.436,15.664 24.436,14.064 26.5,12 27.7,12 28,12.3 28,20.5 24.5,24 24.5,29.2 18.817,34.883 18.817,48.317 19.1,48.6 19.5,48.6 19.9,48.2 19.9,45 21.8,43.1 23.35,43.1 24.25,44 R5.1 24.4,45.75 R3.2
NetR6_2: R6.2 R7.1 U1.5 | length 49
  Bottom Layer w0.2: U1.5 14.478,16.128 15.75,17.4 22.1,17.4 23.875,15.625 23.875,13.875 26.35,11.4 28,11.4 28.6,12 28.6,20.85 25.3,24.15 25.3,31.65 27.65,34 R6.2@29.5,34 ; R7.1@29.441,36.659 29.5,36.6 29.5,33.9 R6.2
NetR8_2: R8.2 R9.1 U1.4 | length 46.9
  Bottom Layer w0.2: U1.4 15.748,16.011 16.537,16.8 21.9,16.8 23.4,15.3 23.4,13.5 26.02,10.88 28.58,10.88 29.2,11.5 29.2,20.95 25.7,24.45 25.7,31.321 26.339,31.96 27.34,31.96 29.15,30.15 29.35,29.95 R9.1 ; R8.2 29.28,29.75 29.425,29.895 R9.1@29.555,29.895
NetR14_1: R14.1 R25.2 U1.22 | length 15.9
  Bottom Layer w0.2: U1.22 11.938,22.352 13.09,21.2 21.725,21.2 22.975,19.95 R14.1 R25.2
NetR15_1: R15.1 R23.2 U1.26 | length 15.9
  Bottom Layer w0.2: U1.26 17.058,23.944 17.058,28.642 17.25,28.834 17.25,35.5 R15.1 17.275,36.025 17.425,36.025 17.95,36.55 R23.2
NetR16_1: R16.1 R24.2 U1.24 | length 16
  Bottom Layer w0.2: U1.24 14.5,23.882 14.5,22.5 15.1,21.9 20.4,21.9 23.7,25.2 R16.1 23.425,26.525 23.275,26.525 22.6,25.85 R24.2
NetR20_1: R20.1 U1.25 | length 9.5
  Bottom Layer w0.2: U1.25 15.748,27.898 16.85,29 16.85,31.65 16.25,32.25 16.05,32.45 R20.1
NetR21_1: R21.1 U1.23 | length 7.9
  Bottom Layer w0.2: U1.23 13.208,24.729 13.8,25.321 R21.1
NetR22_1: R22.1 U1.21 | length 19.1
  Bottom Layer w0.2: R22.1 3.65,26.85 3,26.2 2.1,25.3 2.1,21.9 4.4,19.6 8.9,19.6 10.668,21.368 U1.21
NetRX_1: RX.1 U1.11 | length 3.9
  Bottom Layer w0.2: U1.11 6.858,13.742 7.878,12.722 RX.1
NetSCL_1: SCL.1 U1.17 | length 26.4
  Bottom Layer w0.2: U1.17 5.588,24.688 6.25,25.35 6.25,39.15 10.57,43.47 10.57,46.317 11.853,47.6 SCL.1
NetSDA_1: SDA.1 U1.18 | length 26.7
  Bottom Layer w0.2: U1.18 6.858,38.958 11.6,43.7 11.6,45.273 SDA.1@13.988,47.661 ; SDA.1@14.055,47.684 SDA.1@14.07,47.7
NetTX_1: TX.1 U1.12 | length 2.5
  Bottom Layer w0.2: U1.12 5.588,13.129 6.1,12.617 TX.1
NetU1_2: U1.2 U2.5 | length 84
  Top Layer w0.2: v1(22.702,44.402) 23.656,44.402 23.877,44.624 U2.5
  Bottom Layer w0.2: U1.2 18.3,14.592 18.3,13.2 18.1,13 13.862,13 11.7,10.838 11.7,8.74 9.71,6.75 6.81,6.75 1.1,12.46 1.1,36.5 8.6,44 8.6,48.4 9.5,49.3 19.7,49.3 20.7,48.3 20.7,45.333 21.63,44.402 v1(22.702,44.402)
NetU1_3: U1.3 U3.5 | length 41.1
  Top Layer w0.2: v1(26.7,30.922) 27.741,30.922 27.85,31.031 U3.5
  Bottom Layer w0.2: U1.3 17.018,16.018 17.4,16.4 21.6,16.4 22.819,15.181 22.819,13.281 25.82,10.28 28.98,10.28 29.8,11.1 29.8,21.15 26.2,24.75 26.2,30.27 26.7,30.77 v1(26.7,30.922)
pads on no net: U1.6 U1.7 U1.9 U1.14 U1.15 U1.16

## Polygon pours and split planes (outlines as drawn)
+12 on Top Layer "+12_L01_P034" (solid, pour order 34): 13.5,33.472 13.5,38.6 13.85,38.95 16.8,38.95 16.8,32.5 15.636,31.336
+12 on Top Layer "+12_L01_P040" (solid, pour order 40): 12.816,28.901 12.816,24.116 12.55,23.85 11.25,23.85 10.55,23.15 10,23.7 10,27.877
+12 on Top Layer "+12_L01_P039" (solid, pour order 39): 13.35,18.4 13.15,18.6 11.25,18.6 10.75,19.1 10.75,14.6 11.3,15.15 13.15,15.15 13.35,15.35
NetQ2_5 on Top Layer "NETQ2_5_L01_P033" (solid, pour order 33): 20.788,23.376 17.1,23.376 17.1,26.4 17.935,27.235 23.735,27.235 23.735,23.735
GND on Top Layer "GND_L01_P009" (solid, pour order 9): 12.5,44.5 13,45 18.4,45 18.7,44.7 18.7,40.75 18.15,40.2 13.75,40.2 12.5,41.45
GND on Top Layer "GND_L01_P008" (solid, pour order 8): 20.5,32.15 20.5,38 21,38.5 25.05,38.5 25.55,38 25.55,33.8 23.9,32.15
C_OUT on Top Layer "C_OUT_L01_P021" (solid, pour order 21): 18.85,8.95 18.85,13.2 20.265,14.615 25.18,14.615 25.18,17.47 23.775,18.875 15.184,18.875 15.184,6.484 15.15,6.45
A_OUT on Top Layer "A_OUT_L01_P032" (solid, pour order 32): 3.671,39.24 2.51,39.24 1.73,38.46 1.73,35.33 3.85,35.33 4.06,35.54
NetQ1_5 on Top Layer "NETQ1_5_L01_P031" (solid, pour order 31): 6.75,34.05 7.73,35.07 11.781,35.07 12.376,35.665 12.376,40.509 11.315,41.57 11.315,45.63 10.845,46.1 7.175,46.1 7.175,41.925 5.18,39.93 5.18,36.81 6.45,34.05
GND on Top Layer "GND_L01_P007" (solid, pour order 7): 20.866,13.516 24.05,13.516 24.05,8.1 23.289,7.339 19.815,7.339 19.25,7.904 19.25,11.9
C_OUT on Top Layer "C_OUT_L01_P015" (solid, pour order 15): 18.85,9.255 18.85,7.15 16.225,4.525 15.4,5.35 13.61,5.194 13.61,6.76 16.01,9.16
B_OUT on Top Layer "B_OUT_L01_P002" (solid, pour order 2): 27.17,19.85 21,19.85 19.4,21.45 19.4,23.05 27.043,23.05 27.879,22.214
GND on Bottom Layer "GND_L04_P011" (solid, pour order 11): 22.075,5.592 16.75,5.592 16.75,0.608 22.125,0.608
3V3 on 3V3 "3V3_L03_P013" (solid, pour order 13): 30.5,22.6 23.85,22.6 23.75,22.7 23.75,32.1 19.65,32.1 18.1,33.65 18.1,49.45 0.508,49.45 0.508,0.5 30.502,0.5
GND on GND "GND_L02_P014" (solid, pour order 14): 0.508,49.412 0.508,0.5 30.5,0.5 30.5,49.35

## Other copper
GND:
  pour cut-out: 19.3,48.4 19,48.4 19,40.5 21.7,40.5 21.7,38.4 25.8,38.4 25.8,33.4 24.8,32.4 24.8,25.9 25.15,25.9 25.15,32.25 26.1,33.2 26.071,38.671 22,38.671 22,40.8 19.3,40.8
  pour cut-out: 31,25.1 27.25,25.1 27.25,24.8 31,24.8

## Silkscreen, mask and mechanical layers (free items; w line width, h text height)
Top Overlay:
  text "Jonathan v1.1" at 2.78,8.65 h1.75 r90
Board:
  the board outline again, w0